# Altium PCB Main_Power.PcbDoc
Units mil, origin at the board's own origin, x right, y up, seen from the top; angles counter-clockwise.
Board outline 3543.31 x 2362.2 mil, 2 copper layers (Top Layer, Bottom Layer); 29 components, 18 nets, 69 pads, 0 vias.
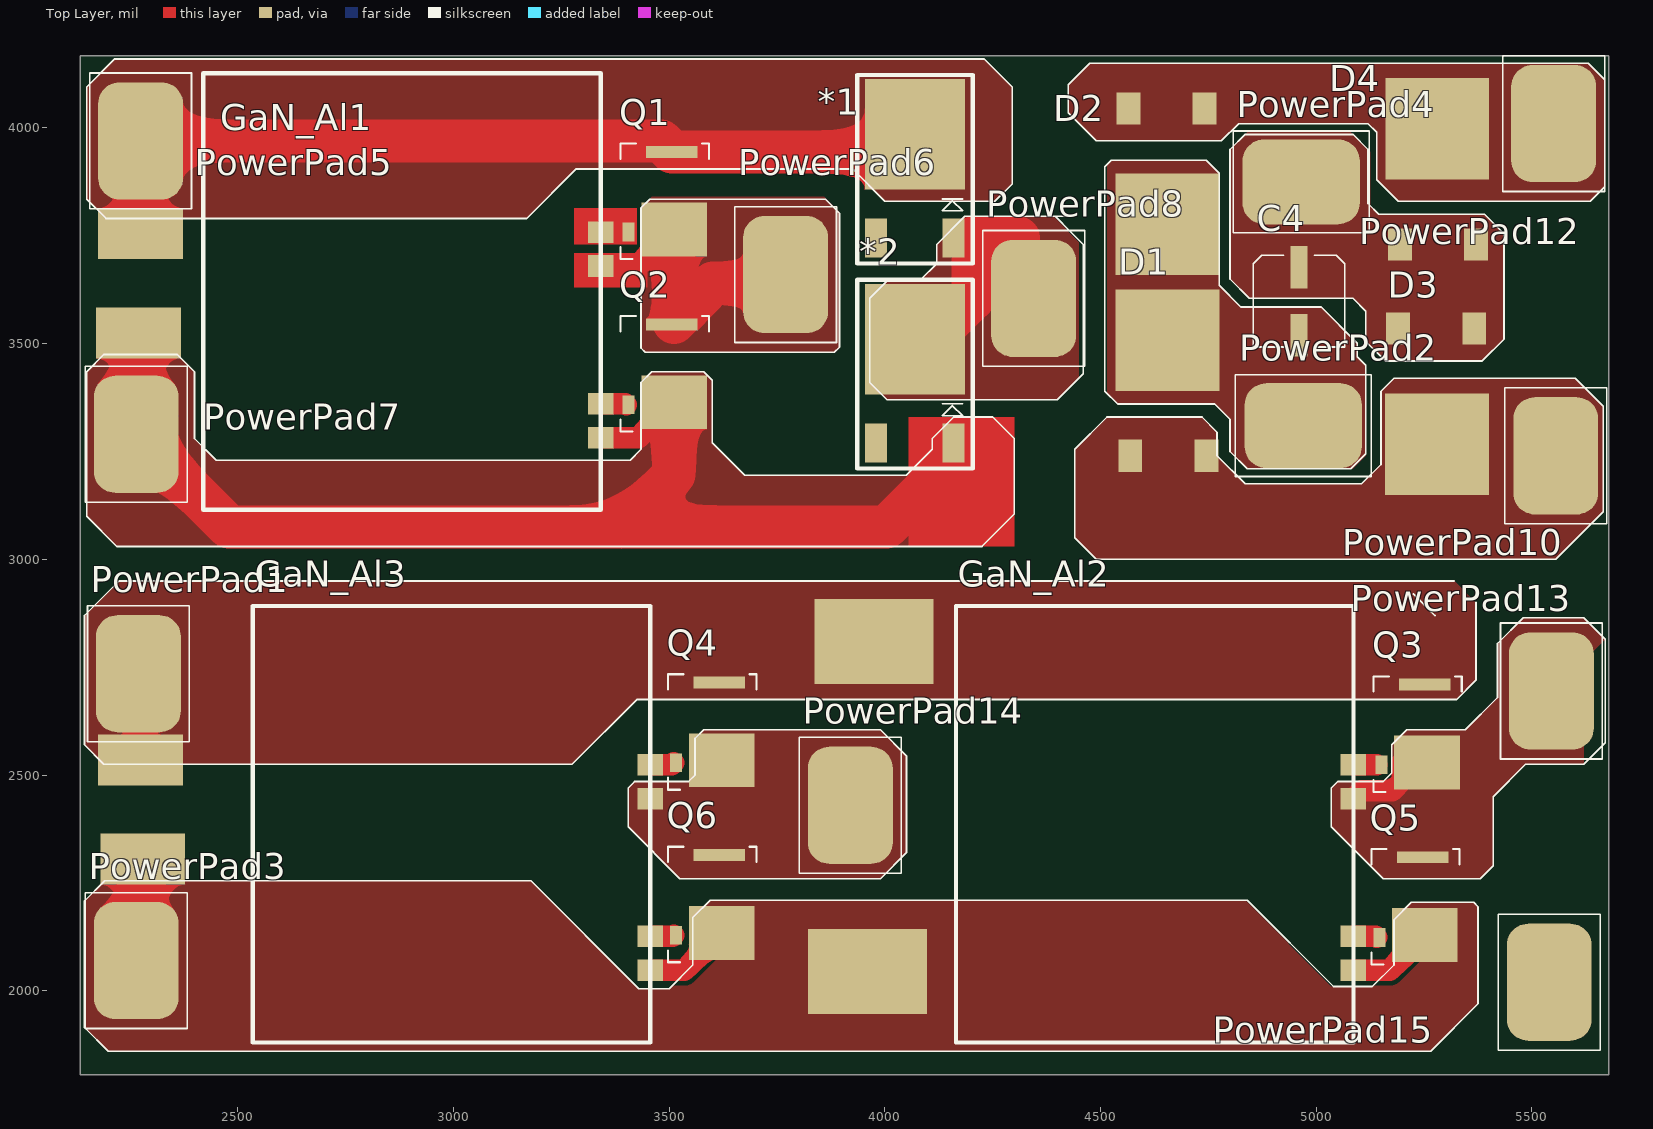
[diagram p0: Top Layer view]
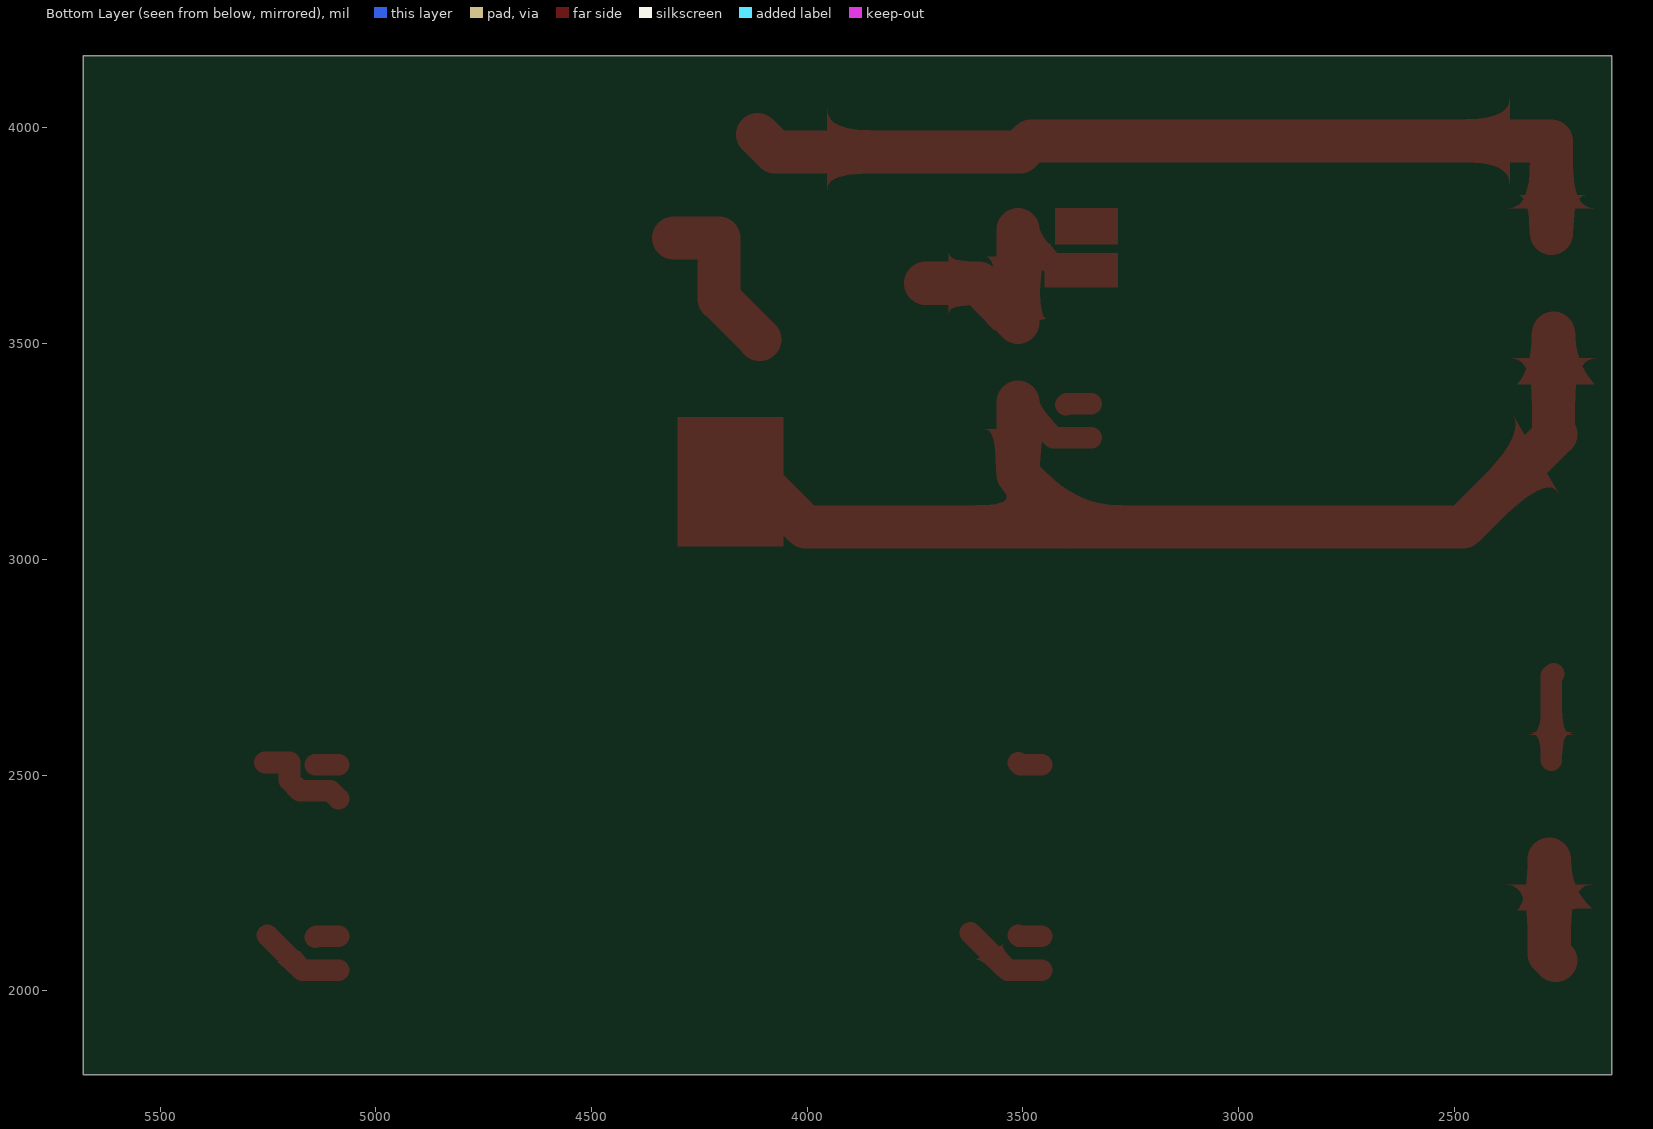
[diagram p1: Bottom Layer view, seen from below]

## Layer stack, top to bottom
Top Solder: solder mask 0.4, Solder Resist, Dk 3.5
Top Layer: signal copper 1.4
Dielectric1: dielectric 12.6, FR-4, Dk 4.8
Bottom Layer: signal copper 1.4
Bottom Solder: solder mask 0.4, Solder Resist, Dk 3.5

## Board outline
2135,1805 2135,4167.2 5678.31,4167.2 5678.31,1805

## Design rules (kind name [scope] priority, off if disabled: settings)
Clearance [All] p1: gap=10
FabricationTestPointUsage TestPointUsage [All] p1: valid=0 allowmultiple=FALSE
FabricationTestpoint Testpoint [All] p1: side=3 testpointundercomponent=TRUE minsize=40 maxsize=100 preferedsize=60 minholesize=0 maxholesize=40 preferedholesize=32 testpointgrid=1 allowsidetop=TRUE allowsidebottom=TRUE usegrid=TRUE gridtolerance=0.01
PolygonConnect [All] p1: connectstyle=Direct reliefconductorwidth=10 reliefentries=4 polygonreliefangle="90 Angle" airgapwidth=10
RoutingVias [All] p1: holewidth=28 width=50 viastyle="Through Hole" minholewidth=28 minwidth=50 maxholewidth=28 maxwidth=50
SolderMaskExpansion [All] p1: expansion=4
Width [All] p1: maxlimit=39370.08 minlimit=10 preferedwidth=10
28 further rules are at their usual default settings.

## Components (designator, comment, footprint, x,y, rotation, side; value= is the part's Value field where it differs from the comment)
*1 "IDD10SG60C" IDD10SG60C 4070,3985 r270 top
*2 "IDD10SG60C" IDD10SG60C 4070,3510 r270 top
C4 "Cap" C_Al 4960,3520 r90 top
D1 "Diode MuR30100A" RFN20 4565,3240 r0 top
D2 "Diode MuR30100A" RFN20 4745,4045 r180 top
D3 "Diode MuR30100A" RFN20 5370,3535 r180 top
D4 "Diode MuR30100A" RFN20 5190,3730 r0 top
GaN_Al1 "integrated GaN" GaN_driver 2420,3115 r0 top
GaN_Al2 "integrated GaN" GaN_driver 4165,1880 r0 top
GaN_Al3 "integrated GaN" GaN_driver 2535,1880 r0 top
PowerPad1 "Powerpad" POWERPAD 2270,2735 r180 top
PowerPad2 "Powerpad" POWERPAD 4970,3310 r270 top
PowerPad3 "Powerpad" POWERPAD 2265,2070 r180 top
PowerPad4 "Powerpad" POWERPAD 4965,3875 r270 top
PowerPad5 "Powerpad" POWERPAD 2275,3970 r180 top
PowerPad6 "Powerpad" POWERPAD 3770,3660 r0 top
PowerPad7 "Powerpad" POWERPAD 2265,3290 r180 top
PowerPad8 "Powerpad" POWERPAD 4345,3605 r180 top
PowerPad10 "Powerpad" POWERPAD 5555,3240 r0 top
PowerPad12 "Powerpad" POWERPAD 5550.24,4010 r0 top
PowerPad13 "Powerpad" POWERPAD 5545,2695 r180 top
PowerPad14 "Powerpad" POWERPAD 3920,2430 r180 top
PowerPad15 "Powerpad" POWERPAD 5540,2020 r180 top (schematic designator PowerPad13)
Q1 "GS66502B" GS66502B 3490,3830 r0 top
Q2 "GS66502B" GS66502B 3490,3430 r0 top
Q3 "GS66502B" GS66502B 5235,2595 r0 top
Q4 "GS66502B" GS66502B 3600,2600 r0 top
Q5 "GS66502B" GS66502B 5230,2195 r0 top
Q6 "GS66502B" GS66502B 3600,2200 r0 top

## Footprints (in the part's own frame and the unit in brackets; to place one, negate y for a bottom-side part, rotate by r counter-clockwise, add the part's x,y. Pads: shape width x height; smd on the part's side, far side on the other; paste and mask are expansions set on the pad)
C_Al [mm]
  rect 2.5x1 smd: 1(0,0) 2(4,0)
  silkscreen extent -0.7,-2.7 4.7,2.7
GaN_driver [mm]
  rect 1.5x1.27 smd: 1(23.4,16.35) 2(23.4,14.35) 3(23.4,6.25) 4(23.4,4.25)
  silkscreen extent 0,0 23.4,25.7
GS66502B [mm] "GAN TRANS E-MODE 650V"
  rect 3.03x0.7 smd: D(0.42,2.91)
  rect 0.7x1.1 smd: G(-2.13,-1.81)
  rect 3.86x3.17 smd: S(0.55,-1.67)
  silkscreen extent -2.6,-3.4 2.6,3.4, body extent -2.5,-3.3 2.5,3.3, height 0.5
IDD10SG60C [mm]
  rect 2.3x1.3 smd: 1(6.1,-2.3) 2(6.1,2.26)
  rect 6.5x5.9 smd: 3(0,0)
  silkscreen extent -3.5,-3.4 7.6,3.4
POWERPAD [mm]
  rrect50% 5x6.9 smd: 1(0,0)
  silkscreen extent -3,-4 3,4
RFN20 [mm]
  rect 1.4x1.9 smd: 2(0.1,0) 2(4.58,0)
  rect 6.1x5.97 smd: 3(2.29,6.815)

## Part data
C4: "Capacitor"
D1 D2 D3 D4: library part Diode, "Default Diode"
GaN_Al1 GaN_Al2 GaN_Al3: library part GaN_Al
Q1 Q2 Q3 Q4 Q5 Q6: "GAN TRANS E-MODE 650V"

## Free pads (board coordinates)
  rect 196.85x118.11 smd: 3(2270,3525) 3(2275,2535) 3(2275,3755) 3(2280,2305)
  rect 275.59x196.85 smd: 3(3960,2045) 3(3975,2810)

## Nets (pads, with @x,y where several pads share a name; then routed paths per layer and width w, separated by ;. In a path a pad name is that pad's centre, name@x,y a point inside that pad or via, vN(x,y) a via of type N, cw(c..) or ccw(c..) an arc to the next point about the centre after c; other vN are vias at no path point)
AC+: GaN_Al1.2 PowerPad6.1 Q1.S Q2.D | length 670.6
  Top Layer w50: GaN_Al1.2 3427.36,3679.96 Q1.S
  Top Layer w100: Q1.S 3511.65,3549.68 3601.97,3640 PowerPad6.1@3725,3640
AC-: *1.2 *2.3 PowerPad8.1 | length 379.9
  Top Layer w100: *2.3@4110,3510 4203.98,3603.98 4203.98,3744.84 4310.16,3744.84
DC48+: C4.1 D1.3 D2.3 PowerPad2.1
DC48-: C4.2 D3.2 D4.2 PowerPad4.1
DC400+: *1.3 pad.3@2275,3755 PowerPad5.1 Q1.D | length 2082.3
  Top Layer w100: pad.3@2275,3755 PowerPad5.1 3481.1,3970 Q1.D 4074.57,3944.57 *1.3@4115,3985
DC400+2: pad.3@2275,2535 pad.3@3975,2810 PowerPad1.1 Q3.D Q4.D | length 202.1
  Top Layer w50: PowerPad1.1 2275,2730 pad.3@2275,2535
DC400-: *2.2 GaN_Al1.4 pad.3@2270,3525 PowerPad7.1 Q2.S | length 2884.8
  Top Layer w50: GaN_Al1.4 3429.72,3282.32 Q2.S
  Top Layer w100: pad.3@2270,3525 2270,3295 PowerPad7.1 2480,3075 3390,3075 ; Q2.S 3511.65,3196.65 3390,3075 ; 4198.98,3269.84 4004.13,3075 3390,3075
DC400-2: GaN_Al2.4 GaN_Al3.4 pad.3@2280,2305 pad.3@3960,2045 PowerPad3.1 Q5.S Q6.S | length 641.9
  Top Layer w50: GaN_Al3.4 3534.72,2047.32 Q6.S ; GaN_Al2.4 5169.72,2047.32 Q5.S
  Top Layer w100: PowerPad3.1 2280,2085 pad.3@2280,2305
G1_DOWN: GaN_Al1.3 Q2.G | length 60.4
  Top Layer w50: GaN_Al1.3 3398.35,3361.06 Q2.G@3400.67,3358.74
G1_UP: GaN_Al1.1 Q1.G | length 59.4
  Top Layer w50: GaN_Al1.1 3400.63,3758.7 Q1.G@3400.67,3758.74
G2_DOWN: GaN_Al2.3 Q5.G | length 55.4
  Top Layer w50: GaN_Al2.3 5138.35,2126.06 Q5.G@5140.67,2123.74
G2_UP: GaN_Al2.1 Q3.G | length 53.7
  Top Layer w50: GaN_Al2.1 5139.88,2523.7 Q3.G@5139.92,2523.74
G3_DOWN: GaN_Al3.3 Q6.G | length 55.5
  Top Layer w50: GaN_Al3.3 3507.99,2126.06 Q6.G@3510.67,2128.74
G3_UP: GaN_Al3.1 Q4.G | length 56.5
  Top Layer w50: GaN_Al3.1 3505.63,2523.7 Q4.G@3510.67,2528.74
RESON1: GaN_Al2.2 PowerPad13.1 Q3.S Q5.D | length 229.7
  Top Layer w50: GaN_Al2.2 5105,2463.7 5176.03,2463.7 5199.92,2487.59 5199.92,2529.25 Q3.S
RESON2: GaN_Al3.2 PowerPad14.1 Q4.S Q6.D
TRANS11: D1.2 D3.3 PowerPad10.1
TRANS22: D2.2 D4.3 PowerPad12.1
pads on no net: *1.1 *2.1 PowerPad15.1

## Polygon pours and split planes (outlines as drawn)
RESON1 on Top Layer "Top Layer-No Net" (solid, pour order 2): 5050,2485 5155,2485 5175,2505 5175,2570 5210,2605 5345,2605 5420,2680 5420,2800 5420,2805 5480,2865 5620,2865 5670,2815 5620,2765 5620,2525 5485,2525 5410,2450 5410,2290 5380,2260 5155,2260 5035,2380 5035,2470 5050,2485
TRANS11 on Top Layer "Top Layer-No Net" (solid, pour order 33): 4515,3330 4735,3330 4770,3295 4770,3240 4835,3175 5105,3175 5150,3220 5150,3390 5180,3420 5600,3420 5665,3355 5665,3110 5555,3000 4490,3000 4440,3050 4440,3255
TRANS22 on Top Layer "Top Layer-No Net" (solid, pour order 31): 4475,4150 5630,4150 5665,4115 5670,4115 5670,3865 5635,3830 5190,3830 5140,3880 5140,3990 5120,4010 4820,4010 4780,3970 4490,3970 4425,4035 4425,4100 4475,4150
DC48- on Top Layer "Top Layer-No Net" (solid, pour order 29): 4845,3995 5075,3995 5125,3945 5125,3820 5145,3800 5390,3800 5435,3755 5435,3510 5385,3460 5160,3460 5115,3505 5115,3575 5085,3605 4845,3605 4800,3650 4800,3950
DC48+ on Top Layer "Top Layer-No Net" (solid, pour order 34): 4525,3925 4745,3925 4775,3895 4775,3635 4825,3585 5011.3,3585 5095,3501.3 5095,3470 5115,3450 5115,3240 5085,3210 4840,3210 4800,3250 4800,3325 4765,3360 4540,3360 4515,3385 4515,3915
RESON2 on Top Layer "Top Layer-No Net" (solid, pour order 36): 3580,2605 3560,2585 3560,2500 3545,2485 3420,2485 3405,2470 3405,2380 3525,2260 3990,2260 4050,2320 4050,2545 3990,2605
DC400-2 on Top Layer "Top Layer-No Net" (solid, pour order 37): 2191.89,2255 2145,2208.11 2145,1914.41 2146.89,1912.52 2199.41,1860 2200,1860 5265,1860 5375,1970 5375,2195 5365,2205 5220,2205 5180,2165 5180,2060 5130,2010 5040,2010 5035,2010 4835,2210 3595,2210 3555,2170 3555,2060 3500,2005 3430,2005 3180,2255 2191.89,2255
DC400+2 on Top Layer "Top Layer-No Net" (solid, pour order 38): 2225,2950 2145,2870 2145,2570 2190,2525 3275,2525 3425,2675 4020,2675 5325,2675 5370,2720 5370,2900 5320,2950 2225,2950
AC- on Top Layer "Top Layer-No Net" (solid, pour order 9): 4120,3730 4120,3685 4080,3645 4005,3645 3965,3605 3965,3410 4005,3370 4400,3370 4450,3420 4450,3735 4390,3795 4185,3795
AC+ on Top Layer "Top Layer-No Net" (solid, pour order 7): 3455,3835 3435,3815 3435,3490 3445,3480 3885,3480 3895,3490 3895,3805 3865,3835 3860,3840 3460,3840
DC400- on Top Layer "Top Layer-No Net" (solid, pour order 5): 2190,3475 2150,3435 2150,3100 2220,3030 4225,3030 4300,3105 4300,3280 4250,3330 4160,3330 4110,3280 4110,3255 4050,3195 3675,3195 3600,3270 3600,3415 3580,3435 3460,3435 3435,3410 3435,3255 3410,3230 2450,3230 2400,3280 2400,3435 2360,3475 2190,3475
DC400+ on Top Layer "Top Layer-No Net" (solid, pour order 39): 2215,4160 2150,4095 2150,3835 2195,3790 3170,3790 3285,3905 3925,3905 4000,3830 4255,3830 4295,3870 4295,4095 4230,4160 2215,4160

## Other copper
Top Layer:
  rectangle net DC400-: 4055,3030 4300,3330
  rectangle net AC+: 3280,3630 3450,3710
  rectangle net G1_UP: 3280,3730 3425,3815

## Silkscreen, mask and mechanical layers (free items; w line width, h text height)
Top Overlay:
  drawing of 190 lines, arcs and shapes, not listed
Mechanical 1:
  the board outline again, w3.94